# EAGLE board Motherboard (EAGLE 7.2.0)
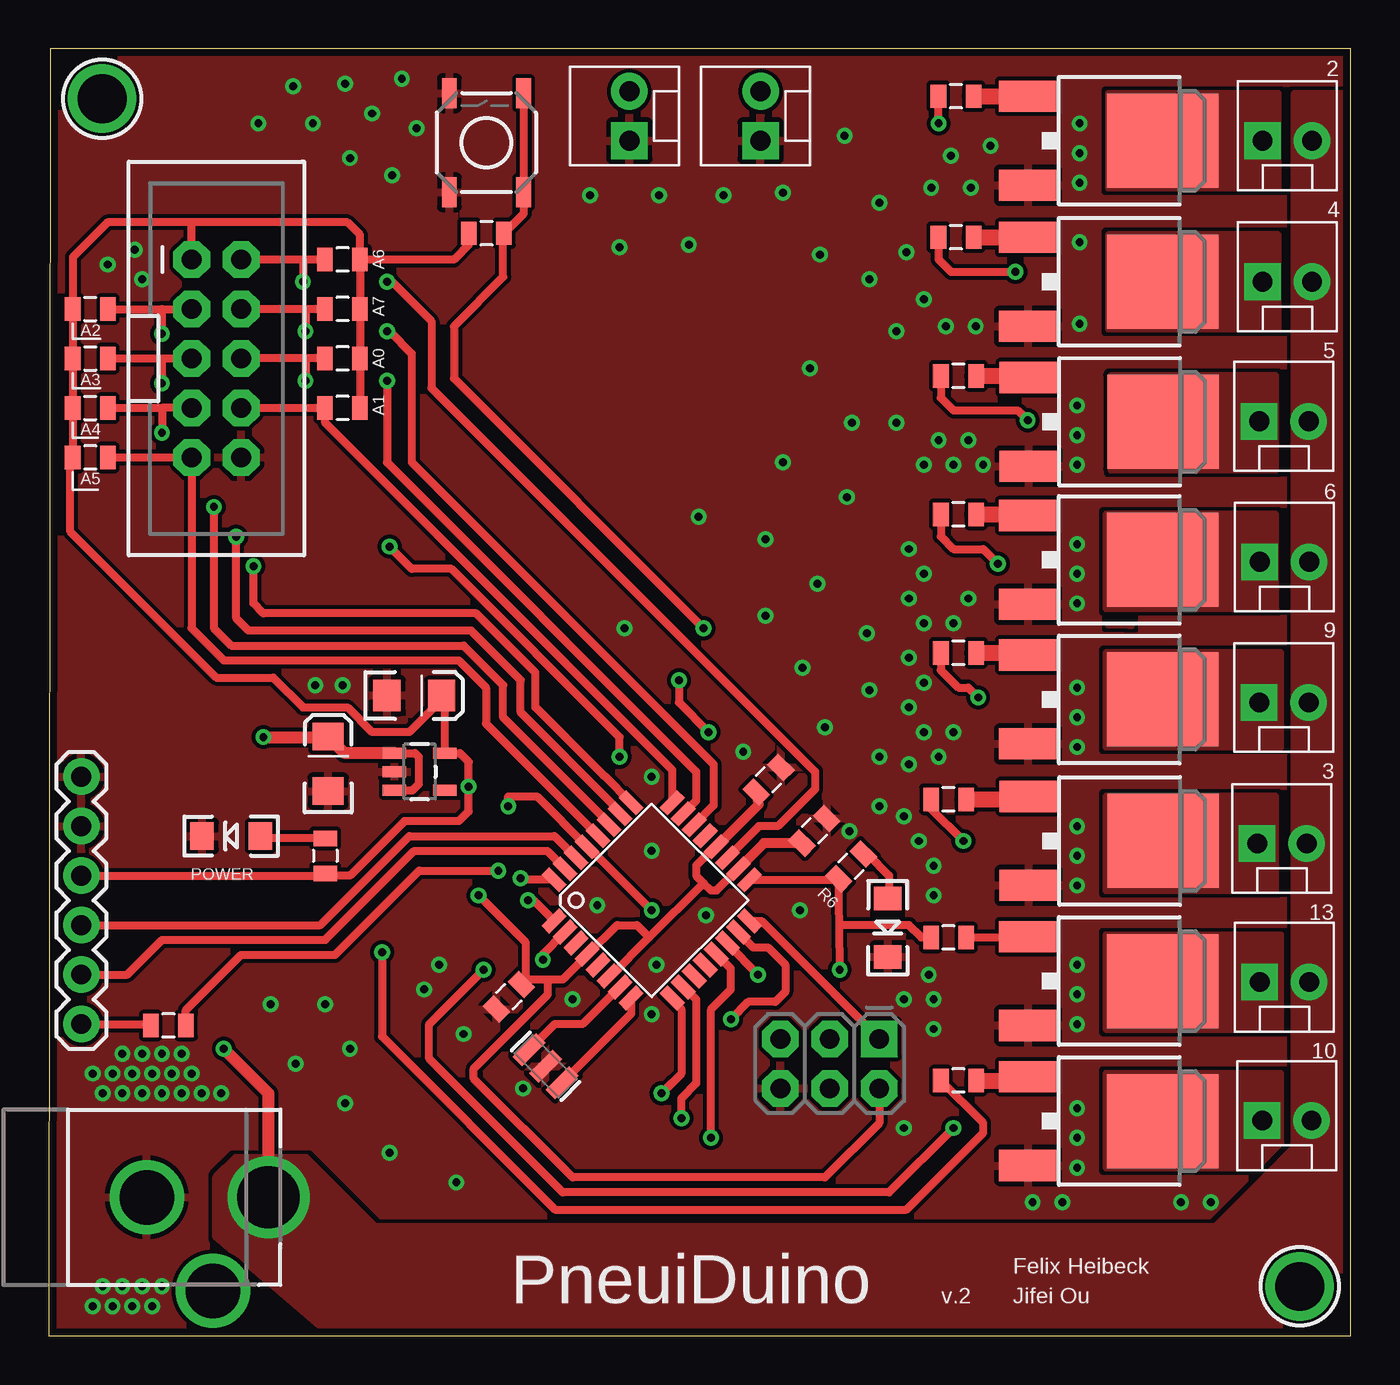
[diagram p0: board, top side]
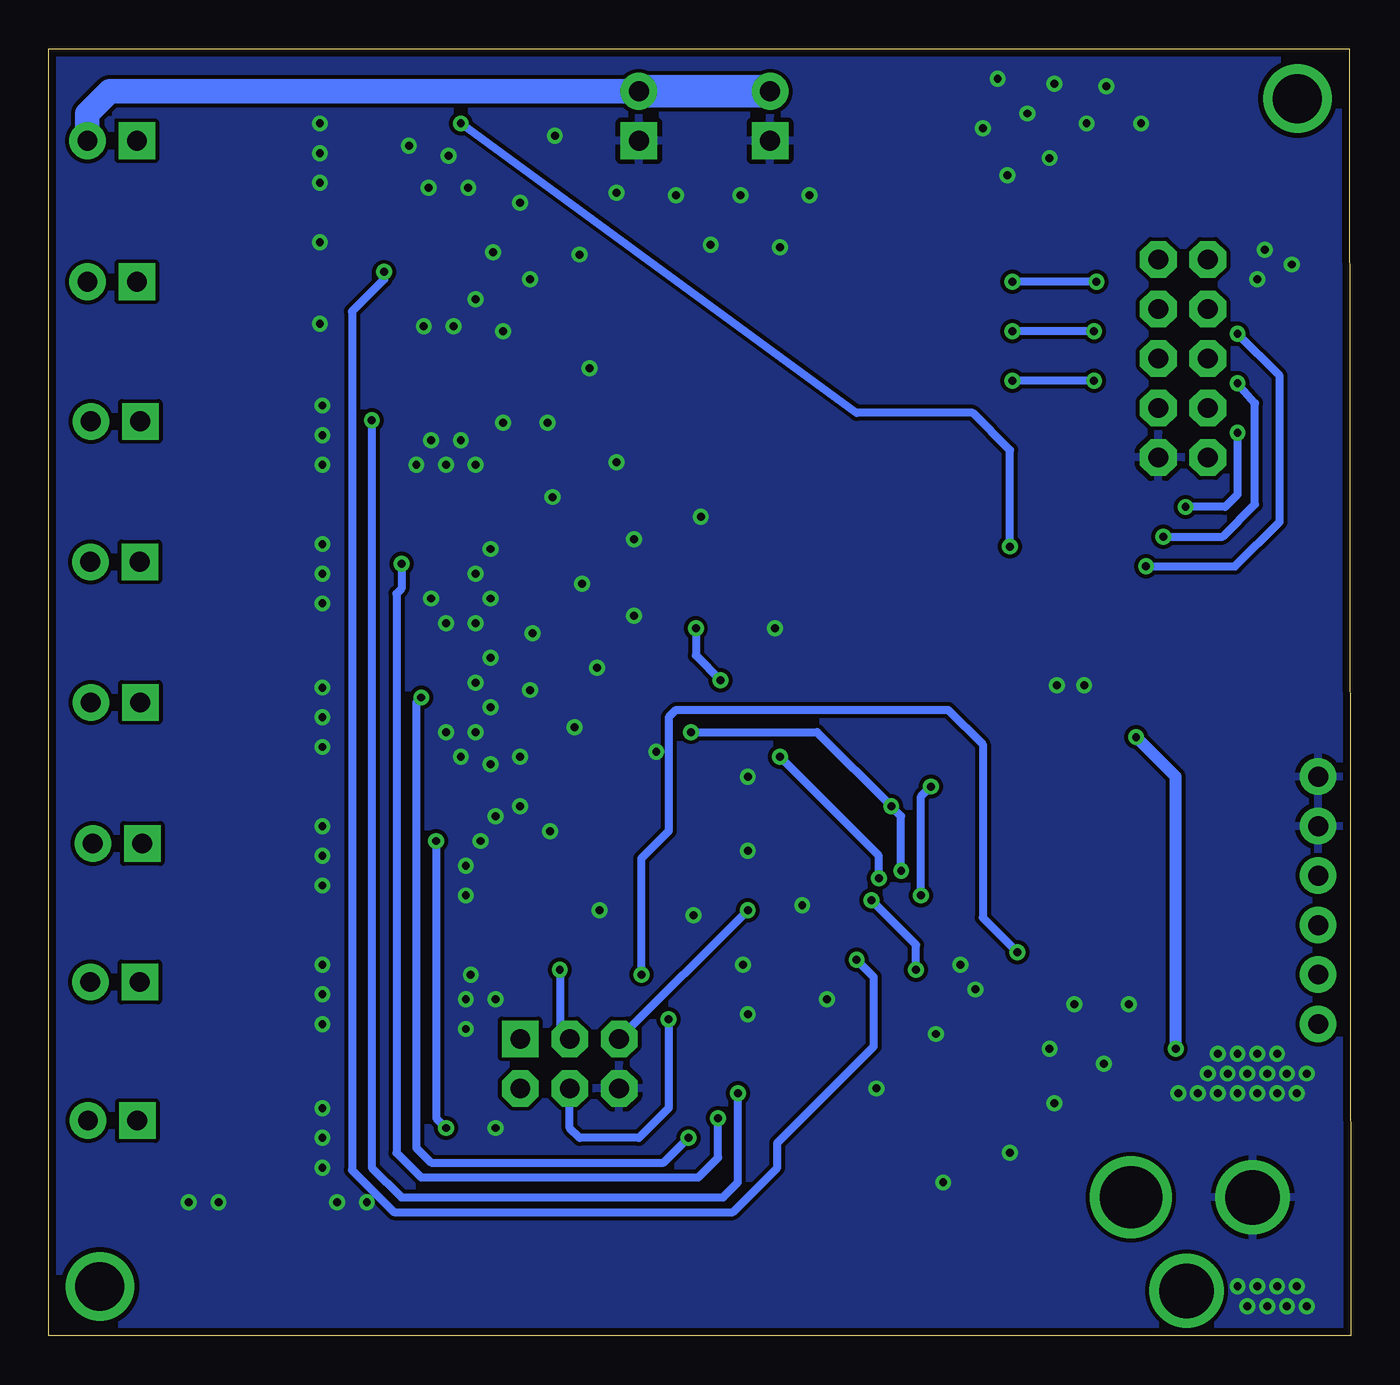
[diagram p1: board, bottom side, seen from below]

Size 66.86 x 66.07 mm. Coordinates in mm from the lower left corner, seen from the top.
Outline: 0,0 66.86,0 66.86,66.07 0.08,66.07 0,0
Copper layers (1*16): Top 0.035mm / dielectric 1.5mm / Bottom 0.035mm
Design rules "default *": minimum track width 10mil, minimum drill 16mil, track to track 8mil, track to pad 8mil, pad to pad 8mil, via to via 8mil, smd to smd 8mil, copper to edge 15mil, drill to drill 8mil, minimum pad ring 10mil, minimum via ring 8mil, stop-mask expansion 4mil, vias tented up to drill 17mil, thermal gap 10mil
Net classes: 0 default: width 0.203 mm; 1 vcc: width 0.254 mm

## Footprints (pad centres in the part's own frame; a part is rotated, then mirrored left to right if it is on the bottom)
0805 = smd 0.8 x 1.2: 1 -0.9,0; 2 0.9,0
EIA3216 = smd 1.4 x 1.6: A 1.4,0; C -1.4,0
DCJACK_2MM_PTH = drill 2.8: GND 0,7.35; GNDBREAK 4.8,10.75 | drill 3.2: PWR 0,13.6
LED-1206 = smd 1.2 x 1.4: A -1.5,0; C 1.5,0
TQFP32-08 = smd 1.27 x 0.559: 1 -4.293,2.8; 2 -4.293,2; 3 -4.293,1.2; 4 -4.293,0.4; 5 -4.293,-0.4; 6 -4.293,-1.2; 7 -4.293,-2; 8 -4.293,-2.8; 17 4.293,-2.8; 18 4.293,-2; 19 4.293,-1.2; 20 4.293,-0.4; 21 4.293,0.4; 22 4.293,1.2; 23 4.293,2; 24 4.293,2.8 | smd 0.559 x 1.27: 9 -2.8,-4.293; 10 -2,-4.293; 11 -1.2,-4.293; 12 -0.4,-4.293; 13 0.4,-4.293; 14 1.2,-4.293; 15 2,-4.293; 16 2.8,-4.293; 25 2.8,4.293; 26 2,4.293; 27 1.2,4.293; 28 0.4,4.293; 29 -0.4,4.293; 30 -1.2,4.293; 31 -2,4.293; 32 -2.8,4.293
2X3-NS = drill 1.016 pad 1.88 square: 1 -2.54,-1.27 | drill 1.016 pad 1.88 octagon: 2 -2.54,1.27; 3 0,-1.27; 4 0,1.27; 5 2.54,-1.27; 6 2.54,1.27
1X06 = drill 1.016 pad 1.88: 1 0,0; 2 2.54,0; 3 5.08,0; 4 7.62,0; 5 10.16,0; 6 12.7,0
MOLEX-1X2 = drill 1.016 pad 1.88 square: 1 0,0 | drill 1.016 pad 1.88: 2 2.54,0
2X5-SHROUDED = drill 1.016 pad 1.88 octagon: 1 -1.27,5.08; 2 1.27,5.08; 3 -1.27,2.54; 4 1.27,2.54; 5 -1.27,0; 6 1.27,0; 7 -1.27,-2.54; 8 1.27,-2.54; 9 -1.27,-5.08; 10 1.27,-5.08
RESONATOR-SMD = smd 0.7 x 1.7: 1 -1.2,0; 2 0,0; 3 1.2,0
TACTILE_SWITCH_SMD = smd 1.524 x 0.762: 1 -2.54,1.905; 2 2.54,1.905; 3 -2.54,-1.905; 4 2.54,-1.905
SOT23-5 = smd 0.55 x 1.2: 1 -0.95,-1.3; 2 0,-1.3; 3 0.95,-1.3; 4 0.95,1.3; 5 -0.95,1.3
MOUNTINGHOLE_2.5_PLATED = drill 2.5 pad 3.2: P$1 0,0
DPAK = smd 1.6 x 3: 1 -2.28,-5.31; 3 2.28,-5.31 | smd 4.826 x 5.715: 4 0,1.588

## Placement (x,y rotation side)
C2  1uF  [0805]  6.14,15.93 180 top
C10  0.1uF  [0805]  23.63,17.41 225 top
C11  0.1uF  [0805]  39.31,25.92 225 top
C12  0.1uF  [0805]  36.96,28.54 225 top
C13  2.2uF (TANT)  [EIA3216]  18.77,32.87 0 top
C19  10uF  [EIA3216]  14.35,29.36 90 top
CN2  [DCJACK_2MM_PTH]  -2.31,7.11 270 top
D3  Yellow  [LED-1206]  43.08,20.95 270 top
IC3  ATMEGA328  [TQFP32-08]  30.96,22.35 45 top
J1  AVR_SPI_PRG_6NS  [2X3-NS]  40.11,13.97 180 top
JP1  FTDI Basic  [1X06]  1.68,16 90 top
JP2  M02POLAR  [MOLEX-1X2]  62.33,61.34 0 top
JP3  M02POLAR  [MOLEX-1X2]  62.33,54.1 0 top
JP4  M05X2SHD  [2X5-SHROUDED]  8.61,50.16 0 top
JP5  M02POLAR  [MOLEX-1X2]  36.55,61.34 90 top
JP6  M02POLAR  [MOLEX-1X2]  62.05,25.27 0 top
JP7  M02POLAR  [MOLEX-1X2]  62.18,18.16 0 top
JP8  M02POLAR  [MOLEX-1X2]  62.31,11.05 0 top
JP9  M02POLAR  [MOLEX-1X2]  62.15,46.94 0 top
JP10  M02POLAR  [MOLEX-1X2]  62.18,39.73 0 top
JP11  M02POLAR  [MOLEX-1X2]  62.15,32.51 0 top
JP12  M02POLAR  [MOLEX-1X2]  29.82,61.34 90 top
POWER  Red  [LED-1206]  9.37,25.65 180 top
Q1  8/16/20MHz  [RESONATOR-SMD]  25.51,13.83 135 top
R1  500  [0805]  46.71,49.28 180 top
R2  10K  [0805]  22.48,56.59 180 top
R3  500  [0805]  46.71,42.16 180 top
R4  500  [0805]  46.71,35.05 180 top
R6  330  [0805]  41.2,24.1 45 top
R9  500  [0805]  46.2,27.53 180 top
R10  500  [0805]  46.2,20.45 180 top
R11  500  [0805]  14.2,24.64 270 top
R12  500  [0805]  46.71,13.11 180 top
R13  10k  [0805]  15.09,55.24 180 top
R14  10k  [0805]  15.09,52.7 180 top
R15  500  [0805]  46.58,63.63 180 top
R16  500  [0805]  46.58,56.39 180 top
R17  10k  [0805]  15.09,50.16 180 top
R18  10k  [0805]  15.09,47.62 180 top
R19  10k  [0805]  2.13,45.09 180 top
R20  10k  [0805]  2.13,50.16 0 top
R21  10k  [0805]  2.13,47.62 0 top
R23  10k  [0805]  2.13,52.7 0 top
S2  Reset  [TACTILE_SWITCH_SMD]  22.48,61.24 90 top
U2  MIC5205  [SOT23-5]  19.05,28.96 270 top
U$1  MOUNTINGHOLE2.5  [MOUNTINGHOLE_2.5_PLATED]  2.74,63.5 0 top
U$2  MOUNTINGHOLE2.5  [MOUNTINGHOLE_2.5_PLATED]  64.24,2.54 0 top
V1  MJD122  [DPAK]  55.63,46.91 270 top
V2  MJD122  [DPAK]  55.6,39.83 270 top
V3  MJD122  [DPAK]  55.6,32.66 270 top
V4  MJD122  [DPAK]  55.63,25.4 270 top
V5  MJD122  [DPAK]  55.6,18.21 270 top
V6  MJD122  [DPAK]  55.6,11.02 270 top
V7  MJD122  [DPAK]  55.6,61.34 270 top
V8  MJD122  [DPAK]  55.6,54.1 270 top

## Library data of the parts
C2 C10-C12 = SparkFun-Capacitors
C13 C19 IC3 JP1 Q1 S2 U2 = SparkFun
CN2 = adafruit
D3 = SparkFun-LED; PROD_ID: DIO-09909
J1 JP2-JP12 = SparkFun-Connectors
POWER = SparkFun-LED; PROD_ID: DIO-00809
R1-R4 R6 R9-R21 R23 = SparkFun-Resistors
U$1 U$2 = microbuilder
V1-V8 = digikey

## Nets
5V: C10.1 C11.2 C12.2 C13.A IC3.4 IC3.6 IC3.18 IC3.20 J1.2 JP1.4 JP4.1 R2.2 R11.2 R13.1 R14.1 R17.1 R18.1 R19.2 R20.1 R21.1 R23.1 U2.5
DTR: C2.2 JP1.1
EXT_A0: IC3.23 JP4.6 R17.2
EXT_A1: IC3.24 JP4.8 R18.2
EXT_A2: IC3.25 JP4.3 R23.2
EXT_A3: IC3.26 JP4.5 R20.2
EXT_A4: IC3.27 JP4.7 R21.2
EXT_A5: IC3.28 JP4.9 R19.1
EXT_A6: IC3.19 JP4.2 R13.2
EXT_A7: IC3.22 JP4.4 R14.2
GND [vcc]: C10.2 C11.1 C12.1 C13.C C19.C CN2.GND D3.C IC3.3 IC3.5 IC3.21 J1.6 JP1.5 JP1.6 JP4.10 JP5.1 JP12.1 POWER.C Q1.2 S2.1 S2.2 U2.2 V1.3 V2.3 V3.3 V4.3 V5.3 V6.3 V7.3 V8.3
GND_V1 [vcc]: JP6.1 V4.4
GND_V2 [vcc]: JP7.1 V5.4
GND_V3 [vcc]: JP8.1 V6.4
GND_V4 [vcc]: JP9.1 V1.4
GND_V6 [vcc]: JP11.1 V3.4
GND_V7: JP2.1 V7.4
GND_V8: JP3.1 V8.4
GND_VZ [vcc]: JP10.1 V2.4
GNDBREAK: CN2.GNDBREAK
MISO: IC3.16 J1.1
MOSI: IC3.15 J1.4
N$1: IC3.8 Q1.1
N$2: IC3.7 Q1.3
N$3: R9.1 V4.1
N$4: R1.1 V1.1
N$5: R10.1 V5.1
N$6: R12.1 V6.1
N$7: D3.A R6.2
N$8: R3.1 V2.1
N$11: R4.1 V3.1
N$12: R16.1 V8.1
N$14: R15.1 V7.1
N$38: POWER.A R11.1
NPN_B1: IC3.9 R1.2
NPN_B2: IC3.10 R3.2
NPN_B3: IC3.13 R4.2
NPN_B4: IC3.1 R9.2
NPN_B6: IC3.14 R12.2
NPN_B7: IC3.32 R15.2
NPN_B8: IC3.2 R16.2
RAW [vcc]: C19.A CN2.PWR JP2.2 JP3.2 JP5.2 JP6.2 JP7.2 JP8.2 JP9.2 JP10.2 JP11.2 JP12.2 U2.1 U2.3
RESET: C2.1 IC3.29 J1.5 R2.1 S2.3 S2.4
RXI: IC3.30 JP1.3
SCK: IC3.17 J1.3 R6.1 R10.2
TXO: IC3.31 JP1.2

## Tracks (layer width: path | path; a pad name or v marks a point on that pad's centre or on a via)
5V  (via drill 0.41)
  Top 0.406: IC3.20 34.22,25.1 33.25,24.13 33.25,23.62 33.63,23.24 | 33.63,23.24 34.01,22.86 34.3,22.86 IC3.18 | IC3.6 28.86,18.47 30.84,20.45 | 30.84,20.45 33.63,23.24 | 30.84,20.45 30.2,21.08 29.18,21.08 27.7,19.6 IC3.4 27.64,19.54 26.39,18.29 25.63,18.29 | 25.63,18.29 24.51,18.29 | 24.51,18.29 C10.1 | JP1.4 14.08,23.62 R11.2 14.31,23.62 15.47,23.62 18.26,26.42 21.06,26.42 21.56,26.92 v21.56,28.19 21.56,29.46 21.12,29.91 U2.5 20.35,32.69 C13.A 20.17,32.64 18.52,30.99 16.61,30.99 15.34,32.26 13.06,32.26 11.53,33.78 8.61,33.78 1.12,41.27 1.12,44.97 R19.2 R21.1 R20.1 R23.1 1.24,52.72 1.24,55.37 3.02,57.15 7.34,57.15 | 24.51,18.29 24.51,20.17 v22.07,22.61 | J1.2 42.65,10.92 39.85,8.13 26.9,8.13 21.82,13.21 21.82,13.72 25.63,17.53 25.63,18.29 | R13.1 R14.1 R17.1 R18.1 | R13.1 15.99,56.5 15.34,57.15 7.34,57.15 | R2.2 21.58,56.02 20.8,55.24 R13.1 | JP4.1 7.34,57.15
  Top 0.508: C12.2 36.45,27.27 IC3.20 | C11.2 36.72,25.28 IC3.18
  Bottom 0.406: v22.07,22.61 22.07,27.69 v21.56,28.19
DTR
  Top 0.406: JP1.1 5.17,16 C2.2
EXT_A0  (via drill 0.41)
  Top 0.406: 13.18,50.16 JP4.6 | R17.2 13.18,50.16 | 13.18,50.16 v13.18,49.02 | v17.37,49.02 17.37,44.83 33.25,28.96 33.25,27.47 IC3.23
  Bottom 0.406: v13.18,49.02 v17.37,49.02
EXT_A1
  Top 0.406: JP4.8 R18.2 14.2,47.61 14.2,46.86 32.02,29.04 IC3.24
EXT_A2  (via drill 0.41)
  Top 0.406: IC3.25 28.54,28.74 28.51,28.74 24.99,32.26 24.99,34.04 21.95,37.08 11.02,37.08 10.52,37.59 v10.52,39.5 | R23.2 5.82,52.7 | 5.82,52.7 JP4.3 | v5.82,51.44 5.82,52.7
  Bottom 0.406: v10.52,39.5 5.94,39.5 3.66,41.78 3.66,49.28 v5.82,51.44
EXT_A3  (via drill 0.41)
  Top 0.406: R20.2 5.94,50.16 | 5.94,50.16 JP4.5 | IC3.26 29.34,26.89 24.23,32 24.23,33.66 21.69,36.2 10.26,36.2 9.63,36.83 v9.63,41.02 | v5.82,48.9 5.82,50.04 5.94,50.16
  Bottom 0.406: v9.63,41.02 6.58,41.02 4.93,42.67 4.93,47.88 v5.82,48.9
EXT_A4  (via drill 0.41)
  Top 0.406: R21.2 5.82,47.62 | JP4.7 5.82,47.62 | 5.82,47.62 v5.82,46.35 | v8.48,42.55 8.48,36.32 9.37,35.43 21.31,35.43 23.34,33.4 23.34,31.75 28.78,26.32 IC3.27
  Bottom 0.406: v5.82,46.35 5.82,43.18 6.45,42.55 v8.48,42.55
EXT_A5
  Top 0.406: R19.1 JP4.9 7.34,36.32 8.99,34.67 21.06,34.67 22.45,33.27 22.45,31.43 IC3.28
EXT_A6  (via drill 0.41)
  Top 0.406: 13.06,55.24 JP4.2 | R13.2 13.06,55.24 | 13.06,55.24 v13.06,54.1 | v17.37,54.1 17.63,54.1 19.66,52.07 19.66,48.64 39.34,28.96 39.34,28.07 37.44,26.16 36.47,26.16 IC3.19
  Bottom 0.406: v13.06,54.1 v17.37,54.1
EXT_A7  (via drill 0.41)
  Top 0.406: 13.18,52.7 JP4.4 | R14.2 13.18,52.7 | 13.18,52.7 v13.18,51.56 | v17.37,51.56 17.5,51.56 18.64,50.42 18.64,44.83 34.14,29.34 34.14,27.22 IC3.22
  Bottom 0.406: v13.18,51.56 v17.37,51.56
GND  (via drill 0.41)
  other vias: 20.93,7.87 15.21,11.94 17.5,9.4 26.9,17.27 30.96,28.7 30.96,24.89 28.17,22.1 33.76,21.59 31.22,19.05 30.96,16.51 38.58,21.84 35.66,29.97 41.12,25.91 43.92,17.27 14.2,17.02 11.4,17.02 20.04,19.05 19.28,17.78 24.36,12.7 2.26,13.46 3.28,13.46 4.29,13.46 5.31,13.46 6.32,13.46 7.34,13.46 2.77,12.45 3.78,12.45 4.8,12.45 5.82,12.45 6.83,12.45 7.85,12.45 8.86,12.45 6.83,14.48 5.82,14.48 4.8,14.48 3.78,14.48 2.26,1.52 3.28,1.52 4.29,1.52 5.31,1.52 2.77,2.54 3.78,2.54 4.8,2.54 5.82,2.54 12.67,13.97 15.47,14.73 45.69,45.97 47.22,45.97 46.46,44.7 44.93,44.7 47.98,44.7 43.54,46.86 44.93,39.12 41.25,46.86 44.17,37.85 41,43.05 47.22,37.85 38.71,34.29 44.93,36.58 46.46,36.58 47.35,58.93 42.14,33.15 44.17,32.26 42.14,54.23 43.54,51.56 36.8,36.96 44.93,30.99 46.46,30.99 42.65,29.72 42.65,58.17 45.69,29.72 48.36,61.09 44.93,53.21 44.17,29.34 39.85,31.24 42.65,27.18 43.92,26.67 44.68,25.4 45.44,24.13 45.44,22.61 45.31,58.93 44.04,55.63 44.93,33.53 42.01,36.07 44.17,34.8 44.17,40.39 46.33,60.58 45.19,18.54 45.44,17.27 45.44,15.75 52.81,17.53 52.81,16 52.81,11.68 52.81,8.64 50.52,6.86 52.04,6.86 58.14,6.86 59.66,6.86 52.81,10.16 52.81,19.05 52.81,23.11 52.81,24.64 52.81,26.16 52.81,30.23 52.81,31.75 52.81,33.27 52.81,37.59 52.81,39.12 52.81,40.64 52.81,44.7 52.81,46.23 52.81,47.75 43.92,10.67 21.31,15.49 39.47,38.61 33.38,42.04 29.57,36.32 52.93,51.94 52.93,60.71 52.93,62.23 47.6,51.82 46.08,51.82 3.02,54.99 4.42,55.75 4.8,54.23 15.09,33.4 13.69,33.4 27.79,58.55 37.69,58.67 34.65,58.55 31.34,58.55 29.31,55.88 32.87,56.01 10.77,62.23 18.9,61.98 17.63,59.56 18.14,64.52 16.61,62.74 15.21,64.26 39.09,49.66 39.6,55.5 40.87,61.59 52.93,56.13 52.93,59.18 37.69,44.83 36.8,40.89 15.47,60.45 13.56,62.23 12.55,64.14
  pour Bottom (rank 3): -0.15,66.67 70.71,66.67 70.84,-0.76 -0.03,-0.76
  pour Top (rank 5): 0.61,67.44 70.97,67.44 70.33,-0.51 -0.03,-0.51
GND_V1
  pour Top (no thermals): 55.68,36.42 54.36,36.45 55.4,36.42
  pour Top (no thermals): 54.33,27.69 62.97,27.69 62.97,22.86 54.33,22.86
GND_V2
  pour Top (no thermals): 54.33,20.57 63.22,20.57 63.22,15.75 54.33,15.75
GND_V3
  pour Top (no thermals): 59.77,19.63 59.77,17.14 59.66,17.04 54.99,17.04 54.79,17.25 54.79,19.74
  pour Top (no thermals): 54.33,13.46 63.22,13.46 63.22,9.91 61.95,8.64 54.33,8.64
GND_V4
  pour Top (no thermals): 54.58,49.28 62.97,49.28 62.97,44.45 54.58,44.45
GND_V6
  pour Top (no thermals): 54.33,35.05 63.22,35.05 63.22,30.23 54.33,30.23
GND_V7
  pour Top (no thermals): 54.46,63.75 63.09,63.75 63.09,58.93 54.46,58.93
GND_V8
  pour Top (no thermals): 54.46,56.52 63.09,56.52 63.09,51.69 54.46,51.69
GND_VZ
  pour Top (no thermals): 54.33,42.16 62.97,42.16 62.97,37.34 54.33,37.34
MISO
  Top 0.406: IC3.16 36.59,21.3 J1.1
MOSI  (via drill 0.41)
  Top 0.406: IC3.15 35.41,20.7 36.17,19.94 36.93,19.94 37.82,19.05 37.82,17.65 37.31,17.14 35.92,17.14 v35.03,16.26
  Bottom 0.406: v35.03,16.26 35.03,11.68 36.55,10.16 39.6,10.16 40.11,10.67 J1.4
N$1
  Top 0.406: IC3.8 29.91,16.53 Q1.1
N$2
  Top 0.406: IC3.7 29.31,17.9 27.41,16 25.98,16 Q1.3
N$3
  Top 0.813: R9.1 50.17,27.53 V4.1
N$4
  Top 0.813: R1.1 50.23,49.28 V1.1
N$5
  Top 0.406: R10.1 50.25,20.45 V5.1
N$6
  Top 0.813: R12.1 50.09,13.11 V6.1
N$7
  Top 0.406: R6.2 42.04,24.74 43.15,23.62 43.15,22.52 D3.A
N$8
  Top 0.813: R3.1 50.23,42.16 V2.1
N$11
  Top 0.813: 50.52,35.05 50.77,34.8 50.44,34.8 V3.1 50.18,35.05 R4.1
N$12
  Top 0.813: R16.1 V8.1
N$14
  Top 0.813: R15.1 V7.1
N$38
  Top 0.406: R11.1 10.99,25.54 POWER.A
NPN_B1  (via drill 0.41)
  Top 0.406: R1.2 45.81,48.14 46.46,47.5 49.76,47.5 v50.27,46.99 | 32.02,12.99 v31.47,12.45 32.49,13.46 32.49,16.76 32.02,17.23 IC3.9
  Bottom 0.406: v50.27,46.99 50.27,8.64 48.74,7.11 32.23,7.11 31.47,7.87 v31.47,12.45
NPN_B2  (via drill 0.41)
  Top 0.406: R3.2 45.81,41.03 46.46,40.39 47.98,40.39 v48.74,39.62 | v32.49,11.18 32.49,12.19 33.25,12.95 33.25,17.27 32.62,17.9 IC3.10
  Bottom 0.406: v48.74,39.62 48.74,38.35 49,38.1 49,9.4 47.73,8.13 33.5,8.13 32.49,9.14 v32.49,11.18
NPN_B3  (via drill 0.41)
  Top 0.406: R4.2 45.81,34.17 46.71,33.27 47.22,33.27 v47.73,32.77 | v34.01,10.16 34.01,16.76 35.03,17.78 35.03,18.85 IC3.13
  Bottom 0.406: v47.73,32.77 47.98,32.51 47.98,9.65 47.22,8.89 35.28,8.89 v34.01,10.16
NPN_B4  (via drill 0.41)
  Top 0.406: R9.2 45.3,27.06 v46.96,25.4 | v46.46,10.67 43.15,7.37 26.39,7.37 19.53,14.22 19.53,16 v22.33,18.8 | v24.61,22.35 24.89,22.35 IC3.1
  Bottom 0.406: v46.96,25.4 46.96,11.18 v46.46,10.67 | v22.33,18.8 22.33,20.07 v24.61,22.35
NPN_B6  (via drill 0.41)
  Top 0.406: IC3.14 34.85,20.12 v36.42,18.54 | v17.12,19.68 17.12,15.37 26.01,6.48 44.04,6.48 47.98,10.41 47.98,10.94 R12.2
  Bottom 0.406: v36.42,18.54 36.42,24.51 35.03,25.91 35.03,31.75 34.65,32.13 20.68,32.13 18.9,30.35 18.9,21.46 v17.12,19.68
NPN_B7  (via drill 0.41)
  Top 0.406: IC3.32 24.32,23.41 v24.23,23.5 | v29.31,29.72 29.31,30.73 20.68,39.37 18.64,39.37 v17.5,40.51 | v45.69,62.23 R15.2
  Bottom 0.406: v24.23,23.5 24.23,24.64 v29.31,29.72 | v17.5,40.51 17.5,45.47 19.41,47.37 25.37,47.37 v45.69,62.23
NPN_B8  (via drill 0.41)
  Top 0.406: R16.2 45.68,55.26 46.33,54.61 v49.63,54.61 | v25.37,19.3 25.37,19.59 IC3.2
  Bottom 0.406: v25.37,19.3 24.49,18.41 24.49,14.86 29.44,9.91 29.44,8.64 31.72,6.35 49.12,6.35 51.28,8.51 51.28,52.58 49.63,54.23 v49.63,54.61
RAW  (via drill 0.41)
  Top 0.406: U2.1 18.81,29.91 19,29.72 19,28.32 18.67,27.99 17.77,27.99 U2.3
  Top 0.61: U2.1 15.21,29.91 C19.A 14.32,30.73 v11.02,30.73 | CN2.PWR 11.29,12.44 v8.99,14.73
  Bottom 0.61: v8.99,14.73 8.99,28.7 v11.02,30.73
  Bottom 1.27: JP5.2 63.73,63.88 64.87,62.74 JP2.2
  Bottom 1.676: JP12.2 JP5.2
  pour Top (no thermals): 16.74,5.59 59.92,5.59 63.98,9.65 63.98,63.75 68.55,63.75 68.81,0.51 13.94,0.51 8.61,5.08 8.61,8.13 9.63,9.14 13.18,9.14
RESET  (via drill 0.41)
  Top 0.406: v30.96,21.84 27.7,25.1 IC3.29 25.06,27.69 23.6,27.69 v23.6,27.18 | S2.4 S2.3 24.38,57.6 R2.1 23.34,56.55 23.34,54.36 20.8,51.82 20.8,49.15 v33.63,36.32 | C2.1 7.04,16.72 9.88,19.56 14.71,19.56 19.02,23.88 v23.09,23.88 | v32.36,33.66 32.36,32.51 v33.88,30.99
  Bottom 0.406: v30.96,21.84 J1.5 | v23.09,23.88 23.09,26.67 v23.6,27.18 27.41,30.99 v33.88,30.99 | v33.63,36.32 33.63,34.92 v32.36,33.66
RXI
  Top 0.406: JP1.3 13.94,21.08 18.52,25.65 25.96,25.65 IC3.30
SCK  (via drill 0.41)
  Top 0.406: IC3.17 40.51,23.41 R6.1 40.56,22.15 40.58,21.07 | 40.58,21.07 v40.61,18.8 | R10.2 44.81,20.45 44.17,21.08 40.59,21.08 40.58,21.07
  Bottom 0.406: v40.61,18.8 40.61,15.75 J1.3
TXO
  Top 0.406: JP1.2 4.04,18.54 5.82,20.32 14.2,20.32 18.77,24.89 25.59,24.89 IC3.31

## Text on the board
tNames: 2 | 4 | A6 | A7 | A2 | A0 | 5 | A3 | A1 | A4 | A5 | 6 | 9 | 3 | 13 | 10 | Felix Heibeck | PneuiDuino | v.2 | Jifei Ou